# Altium PCB CH549EVT_Core_Pac_G@1809.PcbDoc
Units mil, origin at the board's own origin, x right, y up, seen from the top; angles counter-clockwise.
Board outline 1790.42 x 2155.71 mil, 2 copper layers (Top Layer, Bottom Layer); 13 components, 51 nets, 101 pads, 42 vias.
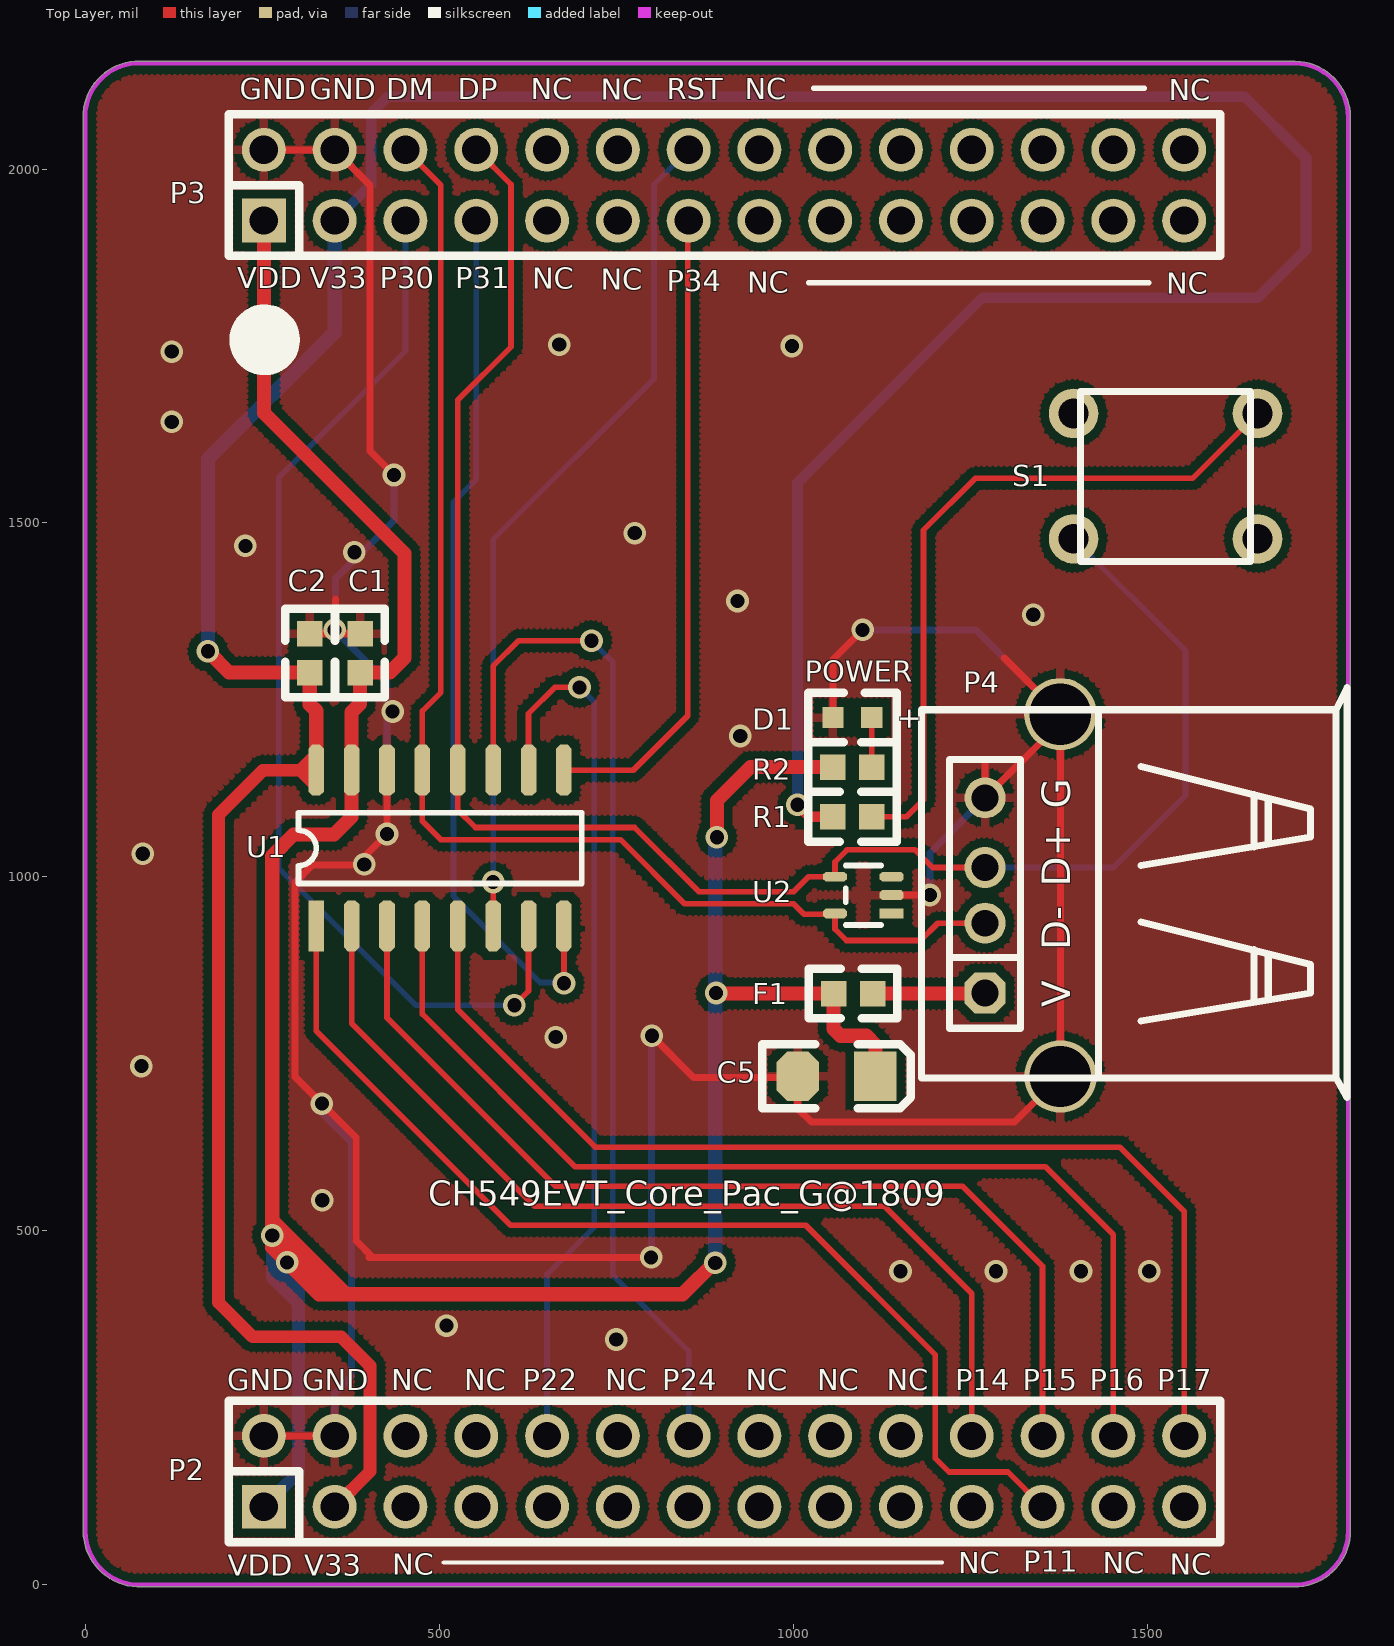
[diagram p0: Top Layer view]
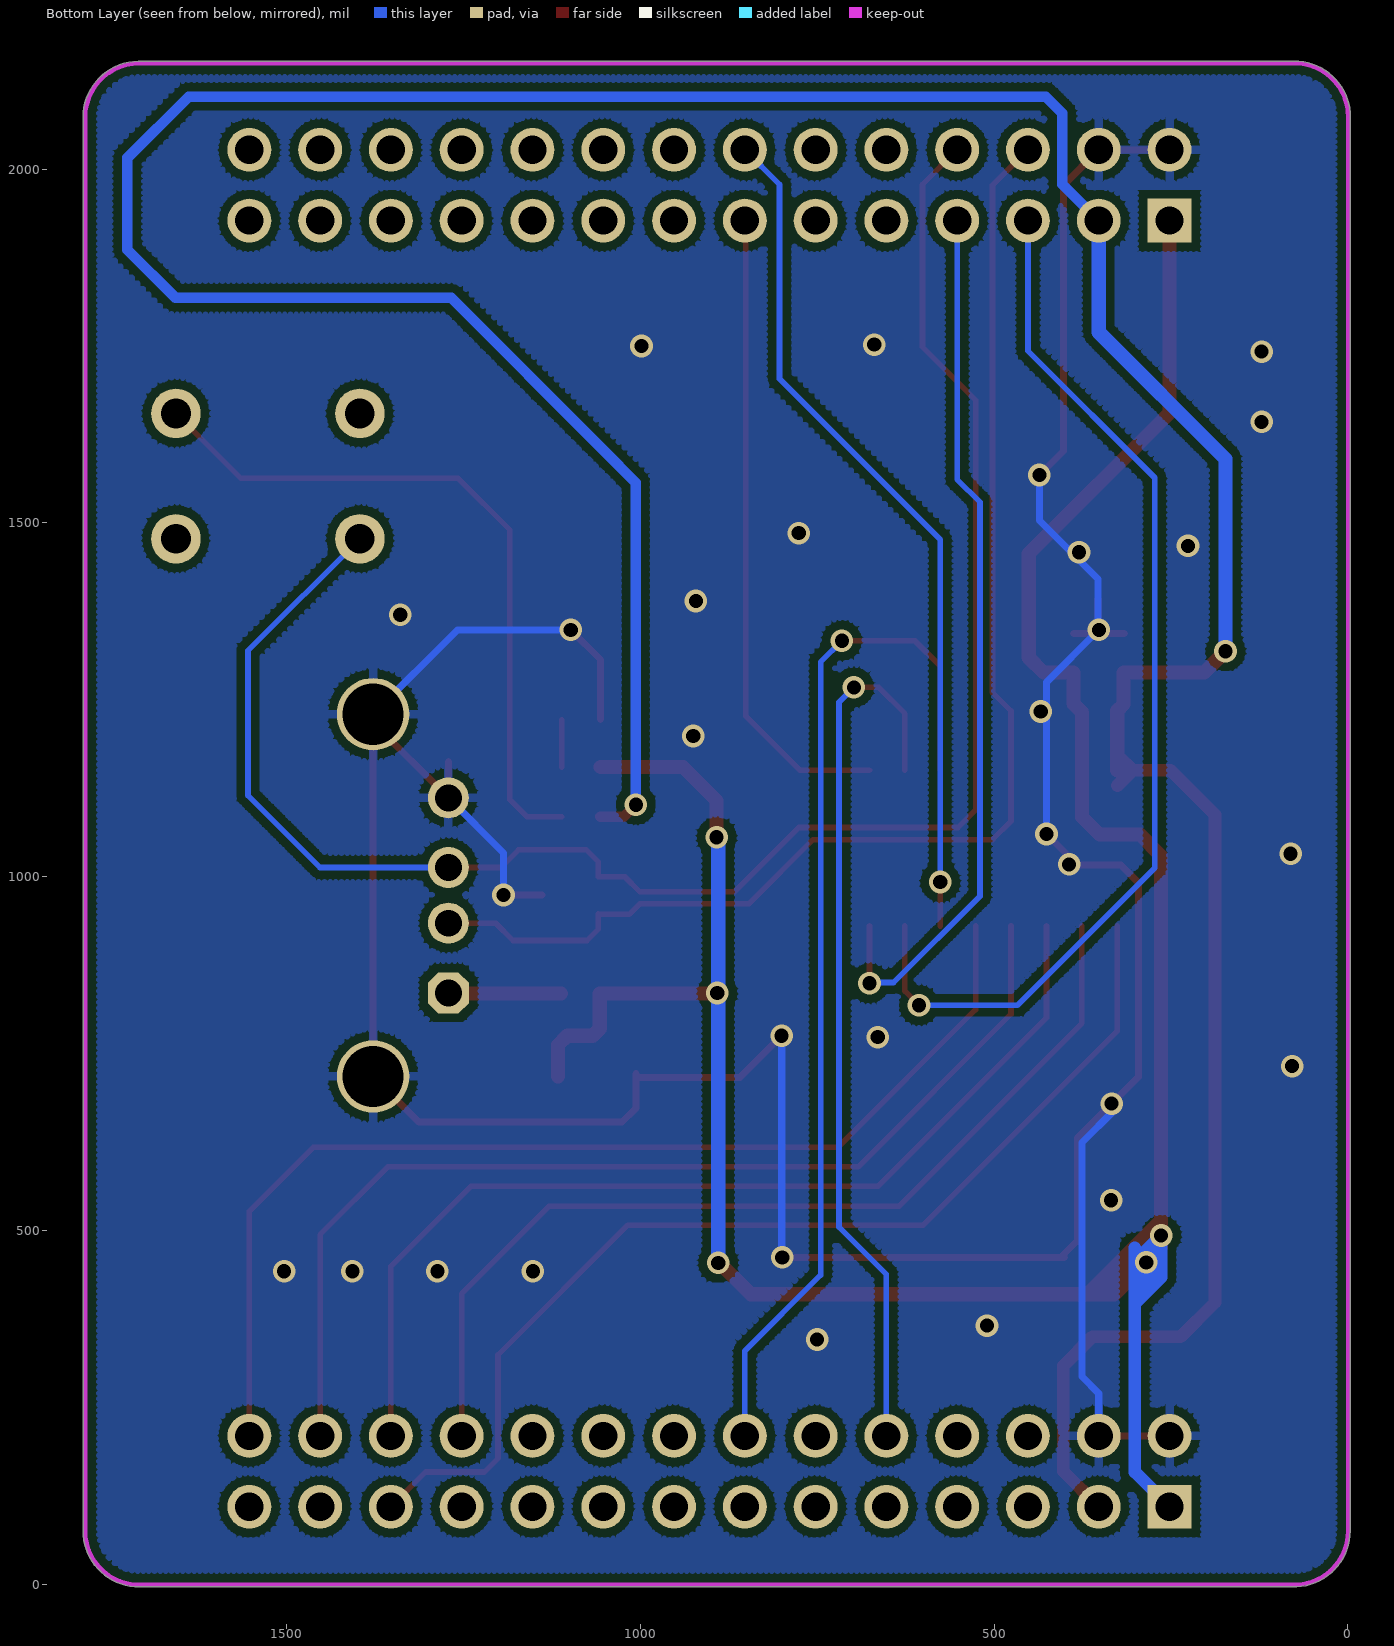
[diagram p1: Bottom Layer view, seen from below]

## Layer stack, top to bottom
Top Layer: signal copper 1.4
Dielectric: dielectric 12.6, FR-4, Dk 4.8
Bottom Layer: signal copper 1.4

## Board outline
72.7,-3.01 ccw(c76.28,76.28) 76.28,-3.09 ccw(c76.28,-0.08) 76.96,-3.01 1706.69,-3.01 ccw(c1706.69,0) 1706.95,-3 ccw(c1707.68,-0.08) 1707.68,-3.09 ccw(c1707.68,76.28) 1787.05,76.28 ccw(c1784.03,76.28) 1786.99,76.89 ccw(c1784,77.31) 1787.02,77.31 1787.02,2072.96 ccw(c1784,2072.96) 1787.01,2072.98 ccw(c1784,2073) 1787.02,2073 ccw(c1707.64,2073) 1708.82,2152.36 ccw(c1707.6,2149.61) 1707.6,2152.62 76,2152.62 ccw(c76,2073.25) -3.37,2073.25 ccw(c-0.36,2073.25) -3.02,2071.83 -3.02,76.96 ccw(c-0.08,76.28) -3.09,76.28 ccw(c76.28,76.28)

## Design rules (kind name [scope] priority, off if disabled: settings)
Clearance Clearance_1 [InPolygon] p1: gap=12
Clearance [All] p2: gap=8
PolygonConnect [IsVia] p1: connectstyle=Direct reliefconductorwidth=10 reliefentries=4 polygonreliefangle="90 Angle"
PolygonConnect PolygonConnect_1 [All] p2: connectstyle=Relief reliefconductorwidth=12 reliefentries=4 polygonreliefangle="90 Angle"
RoutingVias [All] p1: holewidth=20 width=32 viastyle="Through Hole" minholewidth=28 minwidth=50 maxholewidth=20 maxwidth=20
SilkToSilkClearance [All] p1: silktosilkclearance=0
SilkscreenOverComponentPads SilkToSolderMaskClearance [IsPad] p1: minsilkscreentomaskgap=10
SolderMaskExpansion [All] p1: expansion=4
Width [All] p1: maxlimit=50 minlimit=8 preferedwidth=10
26 further rules are at their usual default settings.

## Classes and differential pairs
component class CH549EVT_Core_Pac_G180910n: C1 C2 C5 D1 F1 P2 P3 P4 R1 R2 U1 U2

## Components (designator, comment, footprint, x,y, rotation, side; value= is the part's Value field where it differs from the comment)
C1 "Cap" 0603 388,1343.73 r270 top
C2 "Cap" 0603 317,1343.73 r270 top
C5 "Cap" 3216 1116.06,718.43 r0 top
D1 "LED3" 0603L 1111,1225.18 r180 top
F1 "500mA" 0603 1057,835.18 r0 top
P2 "Header 14X2" IDC28 252.13,110.24 r90 top (schematic designator P14)
P3 "Header 14X2" IDC28 252.13,1927.24 r90 top (schematic designator P15)
P4 "USB" USBA-L 1271,836.18 r90 top
R1 "4.7K" 0603 1056,1085 r0 top
R2 "Res2" 0603 1056,1155.18 r0 top
S1 "" KEYX 1396,1477.63 r90 top
U1 "CH549G" SOP16 326,930.73 r0 top
U2 "CH412Z" SOT353 1139,948.18 r90 top

## Footprints (in the part's own frame and the unit in brackets; to place one, negate y for a bottom-side part, rotate by r counter-clockwise, add the part's x,y. Pads: shape width x height; smd on the part's side, far side on the other; paste and mask are expansions set on the pad)
0603 [mil]
  rect 36x36 smd: 1(0,0) 2(55,0)
  silkscreen extent -35,-35 90,35
0603L [mil]
  rect 30x30 smd: 1(0,0) 2(55,0)
  silkscreen extent -35,-35 90,35
3216 [mil]
  rect 60x70 smd: 1(0,0)
  oct 60x70 smd: 2(-110,0)
  silkscreen extent -160,-45 50,45
IDC28 [mil]
  rect 62x62 hole 40: 1(0,0)
  round 62 hole 40: 2(100,0) 3(0,-100) 4(100,-100) 5(0,-200) 6(100,-200) 7(0,-300) 8(100,-300) 9(0,-400) 10(100,-400) 11(0,-500) 12(100,-500) 13(0,-600) 14(100,-600) 15(0,-700) 16(100,-700) 17(0,-800) 18(100,-800) 19(0,-900) 20(100,-900) 21(0,-1000) 22(100,-1000) 23(0,-1100) 24(100,-1100) 25(0,-1200) 26(100,-1200) 27(0,-1300) 28(100,-1300)
  silkscreen extent -50,-1351 150,50
KEYX [mil]
  round 70 hole 42: 1(0,0) 2(0,-259.84) 3(177.17,-259.84) 4(177.17,0)
  silkscreen extent -32,-250 208,-10
SOP16 [mil]
  rect 22x72 smd: 1(0,0)
  oct 22x72 smd: 2(50,0) 3(100,0) 4(150,0) 5(200,0) 6(250,0) 7(300,0) 8(350,0) 9(350,220) 10(300,220) 11(250,220) 12(200,220) 13(150,220) 14(100,220) 15(50,220) 16(0,220)
  silkscreen extent -25,60 375,160
SOT353 [mil]
  rect 14x34 smd: 1(0,0)
  oct 14x34 smd: 2(26,0) 3(52,0) 4(52,80) 5(0,80)
  silkscreen extent -16,15 68,65
USBA-L [mm]
  oct 1.473x1.473 hole 0.965: 1(0,0)
  round 1.473 hole 0.965: 2(2.5,0) 3(4.5,0) 4(7,0)
  round 2.6 hole 2.2: 5(-3,-2.7) 6(10,-2.7)
  silkscreen extent -3.75,-12.99 10.95,2.29

## Part data
C1 C2 C5: "Capacitor"
D1: "Typical BLUE SiC LED"
F1: library part "Fuse 1", "Fuse"
P2 P3: "Header, 14-Pin, Dual row"
P4: "USB Port"
R1: library part Res2, "Resistor"
R2: "Resistor"
U1: "8bit MCS51 MCU with ADC & USB type-C host & device & dual UART & SPI"
U2: "Quad ESD protect, low speed"

## Via types
v1: diameter 32, hole 20, Top Layer to Bottom Layer, tented both sides, 41 vias
v2: diameter 32, hole 20, Top Layer to Bottom Layer, 1 vias

## Nets (pads, with @x,y where several pads share a name; then routed paths per layer and width w, separated by ;. In a path a pad name is that pad's centre, name@x,y a point inside that pad or via, vN(x,y) a via of type N, cw(c..) or ccw(c..) an arc to the next point about the centre after c; other vN are vias at no path point)
DM: P3.6 P4.2 U1.13 U2.5 | length 1866.3
  Top Layer w8: P3.6 502.13,1977.24 502.13,1260.49 476,1234.36 U1.13 476,1078.73 502,1052.73 755.91,1052.73 846.46,962.18 1000.27,962.18 1015.27,947.18 U2.5@1057,947.18 ; U2.5 1059,926.18 1075,910.18 1179.57,910.18 1204,934.61 P4.2
DP: P3.8 P4.3 S1.1 U1.12 U2.4 | length 2577
  Top Layer w8: P3.8 601.13,1978.24 601.13,1748.77 526,1673.64 U1.12 526,1094.73 551,1069.73 775.87,1069.73 866.42,979.18 1000.73,979.18 1021.73,1000.18 U2.4 1059,1021.18 1076,1038.18 1172,1038.18 1196.83,1013.35 P4.3
  Bottom Layer w8: P4.3 1452.35,1013.35 1554,1115 1554,1319.63 S1.1
GND: C1.1 C2.1 C5.2 D1.2 P2.2 P2.4 P3.2 P3.4 P4.4 P4.5 P4.6 U1.14 U2.2 | length 5587.9
  Top Layer w10: P2.2 P2.4 ; P3.2 P3.4 402.13,1977.24 402.13,1601.6 v1(436,1567.73) ; C2.1@316,1343.73 C2.1 v1@352.5,1343.73 ; v1@326,687.73 296,717.73 296,991.73 321,1016.73 382,1016.73 v1(426,1060.73) U1.14 ; v1(334,679.73) 382,631.73 382,486.57 406,462.57 ; 353,1392.73 353,1344.23 v1@352.5,1343.73 ; C1.1 v1@352.5,1343.73 ; 400.38,462.57 406,462.57 ; v1(799.21,462.57) 406,462.57 ; v1(800.2,775.59) 859.25,716.54 C5.2@1006.06,716.54 ; C5.2@1006.06,722.37 1006.06,673.17 1025.69,653.54 1312.77,653.54 P4.5 1377.3,1218.07 P4.4 1271,1163.18 ; D1.2@1056,1222.18 D1.2 1056,1307 v1(1098,1349) ; U2.2 1181.73,974.18 v2@1183,975.45 ; 1298,1309.18 P4.6
  Bottom Layer w10: v1@331,669.73 375.98,624.75 375.98,294.29 352.13,270.44 P2.4 ; v1(426,1060.73) 426,1275 353,1348 353,1420.73 436,1503.73 v1(436,1567.73) ; v1(799.21,462.57) 800,463.35 v1@800,777.73 ; v1(1098,1349) 1258.18,1349 P4.6 ; v2(1193,974.45) 1193,1033.77 P4.4
  other v1: 750,346.46 510,366.14 1151.57,442.91 1286.42,442.91 1406.5,442.91 1502.95,442.91 334.65,543.31 79,732.73 664.37,773.62 394,1017.73 81,1032.73 925,1199.18 434,1233.73 352,1349 1339,1370.45 921.26,1389.76 380,1458.73 226,1467.73 776,1485.73 122,1642.8 122,1742.11 998.03,1750 669.29,1751.97
NetD1_1: D1.1 R2.2 | length 67
  Top Layer w8: R2.2 D1.1@1111,1222.18
NetF1_2: F1.2 P4.1 | length 158
  Top Layer w20: F1.2 P4.1@1270,835.18
NetP1_2: R1.2 S1.3 | length 1031.9
  Top Layer w8: R1.2 1160,1085 1184,1109 1184,1489.99 1257,1562.99 1564.04,1562.99 S1.3@1675.53,1674.48
P00: P2.5
P01: P2.7
P02: P2.9
P03: P2.11
P04: P2.13
P05: P2.15
P06: P2.17
P07: P2.19
P10: P2.21
P11: P2.23 U1.1 | length 1538.6
  Top Layer w8: U1.1 326,782.37 600.5,507.87 1017.72,507.87 1200.79,324.8 1200.79,178.58 1220.13,159.24 1303.13,159.24 P2.23
P12: P2.25
P13: P2.27
P14: P2.22 U1.2 | length 1372.8
  Top Layer w8: U1.2 376,793.29 634.56,534.73 1128.65,534.73 1252.13,411.25 P2.22
P15: P2.24 U1.3 | length 1441
  Top Layer w8: U1.3 426,800.98 663.98,563 1239.17,563 1352.13,450.03 P2.24
P16: P2.26 U1.4 | length 1514.2
  Top Layer w8: U1.4 476,806.16 691.61,590.55 1356.3,590.55 1452.13,494.72 P2.26
P17: P2.28 U1.5 | length 1579.7
  Top Layer w8: U1.5 526,812.58 720.47,618.11 1461.61,618.11 1552.13,527.59 P2.28
P20: P2.6
P21: P2.8
P22: P2.10 U1.10 | length 1269.7
  Top Layer w8: U1.10 626,1230.73 663,1267.73 v1(698,1267.73)
  Bottom Layer w8: P2.10@646.13,216.24 P2.10 652.13,438.55 719,505.42 719,740.73 719,1246.73 v1(698,1267.73)
P23: P2.12
P24: P2.14 U1.11 | length 1481.2
  Top Layer w8: U1.11 576,1297.73 612,1333.73 v1(715,1333.73)
  Bottom Layer w8: v1(715,1333.73) 745,1303.73 745,437.45 852.13,330.31 P2.14
P25: P2.16
P26: P2.18
P27: P2.20
P30: P3.5 U1.7 | length 1522.3
  Top Layer w8: v1(606,818.73) 626,838.73 U1.7
  Bottom Layer w8: P3.5 452.13,1743.11 273,1563.98 273,1012.73 467,818.73 v1(606,818.73)
P31: P3.7 U1.8 | length 1257.3
  Top Layer w8: v1(676,849.73) U1.8
  Bottom Layer w8: P3.7 552.13,1581.35 552.13,1561.66 520,1529.53 520,972.73 642,850.73 v1@678,850.73
P32: P3.9
P33: P3.11
P34: P3.13 U1.9 | length 906.9
  Top Layer w8: U1.9 774,1150.73 851,1227.73 851,1926.1 P3.13
P35: P3.15
P36: P3.17
P37: P3.19
P40: P3.21
P41: P3.23
P42: P3.25
P43: P3.27
P44: P3.22
P45: P3.24
P46: P3.26
P47: P3.28
P54: P3.10
P55: P3.12
RST: P3.14 U1.6 | length 1210.9
  Top Layer w8: U1.6 v1(576,992.73)
  Bottom Layer w8: v1(576,992.73) 576,1476.59 803.13,1703.72 803.13,1978.24 P3.14
V33: C2.2 P2.3 P3.3 R1.1 U1.16 | length 5445.3
  Top Layer w15: v1(1006,1102) 1023,1085 R1.1
  Top Layer w18: U1.16@324,1170.73 304,1150.73 ; U1.16@326,1128.73 304,1150.73 ; U1.16 304,1150.73 ; P2.3 402.13,160.24 402.13,309.48 361.22,350.39 236.22,350.39 187.99,398.62 187.99,1087.72 251,1150.73 304,1150.73
  Top Layer w20: v1(173,1318.73) 203,1288.73 C2.2 317,1243.73 326,1234.73 U1.16
  Bottom Layer w15: P3.3 403.54,1978.65 403.54,2078.74 427.17,2102.36 1637.8,2102.36 1724.41,2015.75 1724.41,1886 ; v1(1006,1102) 1006,1557 1051.18,1602.18 1267,1818 1656.41,1818 1724.41,1886 ; 1724.41,1931 1724.41,1886
  Bottom Layer w20: v1(173,1318.73) 173,1590.32 352.13,1769.46 P3.3
VDD: C1.2 C5.1 F1.1 P2.1 P3.1 R2.1 U1.15 | length 4513.3
  Top Layer w20: P3.1 252.13,1655.6 451,1456.73 451,1309.73 430,1288.73 C1.2 388,1244.73 376,1232.73 U1.15 376,1084.73 351,1059.73 294,1059.73 264,1029.73 264,514.57 ; v1@891,835.18 F1.1 1057,785.52 1066.93,775.59 1103,775.59 1116.06,762.54 C5.1 ; v1(892,1056) 892,1107.73 939.45,1155.18 R2.1 ; v1@892.74,459.63 843.58,410.46 368.11,410.46 ; v1(264,493.46) 264,476.46 v1(285,455.46) 330,410.46 347,410.46 ; v1(264,493.46) 264,514.57 ; v1(264,493.46) 347,410.46 ; 264,514.57 368.11,410.46 ; 347,410.46 368.11,410.46
  Bottom Layer w18: P2.1 301.13,159.24 301.13,476.07 ; 264.76,462.6 v1@278.45,448.91 ; 273.04,439.56 301.13,411.46 ; 301.13,397.33 264,434.46 ; 301.13,426.23 v1@278.45,448.91 ; 301.13,439.33 v1(285,455.46) ; 301.13,456.33 285,472.46 ; 264,434.46 v1@278.45,448.91 ; 264,434.46 v1(264,493.46) 278,479.46 ; 278,479.46 278,462.46 v1(285,455.46) ; 278,479.46 285,472.46 ; v1@278.45,448.91 v1(285,455.46) ; v1(285,455.46) 285,472.46
  Bottom Layer w20: v1(889.76,454.73) 889.76,1053.76 v1(892,1056)
  other v1: 891,836
pads on no net: P3.16 P3.18 P3.20 S1.2 S1.4 U2.1 U2.3

## Polygon pours and split planes (outlines as drawn)
GND on Bottom Layer "Top Layer-No Net" (hatched 90Degree grid 8 track 8, remove dead copper, pour order 2): 7,2144.27 14,2151.27 1786,2151.27 1786,-10.73 1780,-16.73 1776,-20.73 -8,-20.73 -8,2140.27 -3,2145.27
GND on Top Layer "Top Layer-No Net" (hatched 90Degree grid 8 track 8, remove dead copper, pour order 6): -7,2155.27 -5,2153.27 1788,2153.27 1788,-7.73 1786,-9.73 -8,-9.73

## Keep-outs
Keep-Out Layer:
  lines w6: -0.36,2073.25 cw(c76,2073.25) 76,2149.61 1707.6,2149.61 ; -0.08,76.28 ccw(c76.28,76.28) 76.28,-0.08 ; 0,76.28 0,2076 ; 72.83,0 1706.69,0 ; 1707.6,2149.36 cw(c1707.64,2073) 1784,2073 ; 1707.68,-0.08 ccw(c1707.68,76.28) 1784.03,76.28 ; 1784,77.31 1784,2072.96

## Silkscreen, mask and mechanical layers (free items; w line width, h text height)
Top Overlay:
  circle w50: c253.13,1758.73 r25
  lines w6: 506.13,31.41 639.13,31.41 748.13,31.41 835.13,31.41 1210.13,31.41
  lines w7.87: 1022.13,1839.61 1502.13,1839.61 ; 1029.13,2114 1313.13,2114 1496,2114
  text "GND" at 218.13,2099 h30
  text "GND" at 317.13,2099 h30
  text "DM" at 425.13,2099 h30
  text "DP" at 526.13,2099 h30
  text "NC" at 629.13,2099 h30
  text "RST" at 821.13,2099 h30
  text "NC" at 931.13,2099 h30
  text "NC" at 728.13,2098 h30
  text "NC" at 1530.13,2097 h30
  text "VDD" at 214.13,1831.61 h30
  text "V33" at 317.13,1831.61 h30
  text "P30" at 416.13,1831.61 h30
  text "P31" at 522.13,1831.61 h30
  text "NC" at 631.13,1830.61 h30
  text "NC" at 728.13,1829.61 h30
  text "P34" at 821.13,1827.61 h30
  text "NC" at 935.13,1825.61 h30
  text "NC" at 1527.13,1823.61 h30
  text "POWER" at 1016,1276 h30
  text "CH549EVT_Core_Pac_G@1809" at 484.25,535.43 h35
  text "GND" at 200.13,274.99 h30
  text "GND" at 306.13,274.99 h30
  text "NC" at 432.13,274.99 h30
  text "NC" at 535.13,274.99 h30
  text "P22" at 618.13,274.99 h30
  text "NC" at 734.13,274.99 h30
  text "P24" at 815.13,274.99 h30
  text "NC" at 933.13,274.99 h30
  text "NC" at 1033.63,274.99 h30
  text "NC" at 1132.13,274.99 h30
  text "P14" at 1229.13,274.99 h30
  text "P15" at 1324.13,274.99 h30
  text "P16" at 1419.13,274.99 h30
  text "P17" at 1514.13,274.99 h30
  text "P11" at 1325.13,18.41 h30
  text "NC" at 1233.13,16.41 h30
  text "NC" at 1437.13,16.41 h30
  text "NC" at 433.13,14.41 h30
  text "NC" at 1532.13,14.41 h30
  text "VDD" at 201.13,12.41 h30
  text "V33" at 309.13,12.41 h30

## Text inside footprints (layer, text, board x,y; h text height)
D1: Top Overlay "+" at 1151,1240.18 h30 r270
P4: Top Overlay "G" at 1391,1096.18 h40 r90; Top Overlay "V" at 1391,816.18 h40 r90; Top Overlay "D+" at 1391,986.18 h40 r90; Top Overlay "D-" at 1391,896.18 h40 r90